# Altium PCB main.PcbDoc
Units mm, origin at the board's own origin, x right, y up, seen from the top; angles counter-clockwise.
Board outline 44.4 x 27 mm, 2 copper layers (Top Layer, Bottom Layer), stack 1.671 mm thick; 86 components, 59 nets, 304 pads, 163 vias.
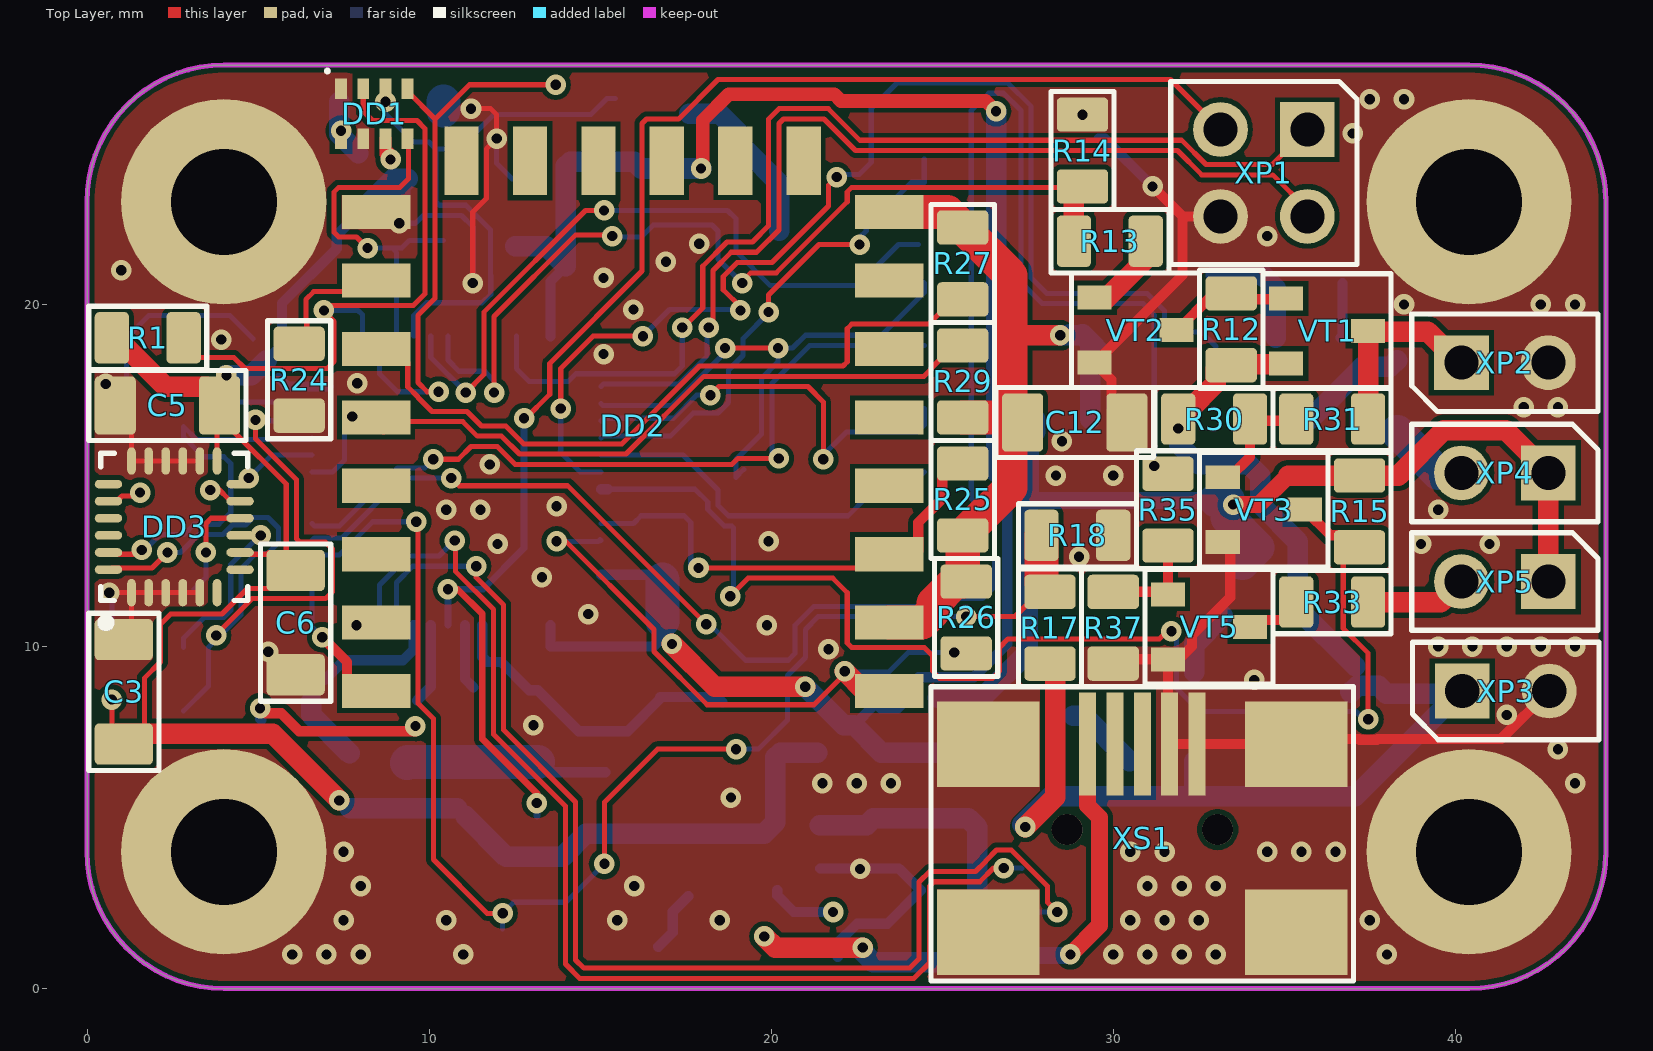
[diagram p0: Top Layer view]
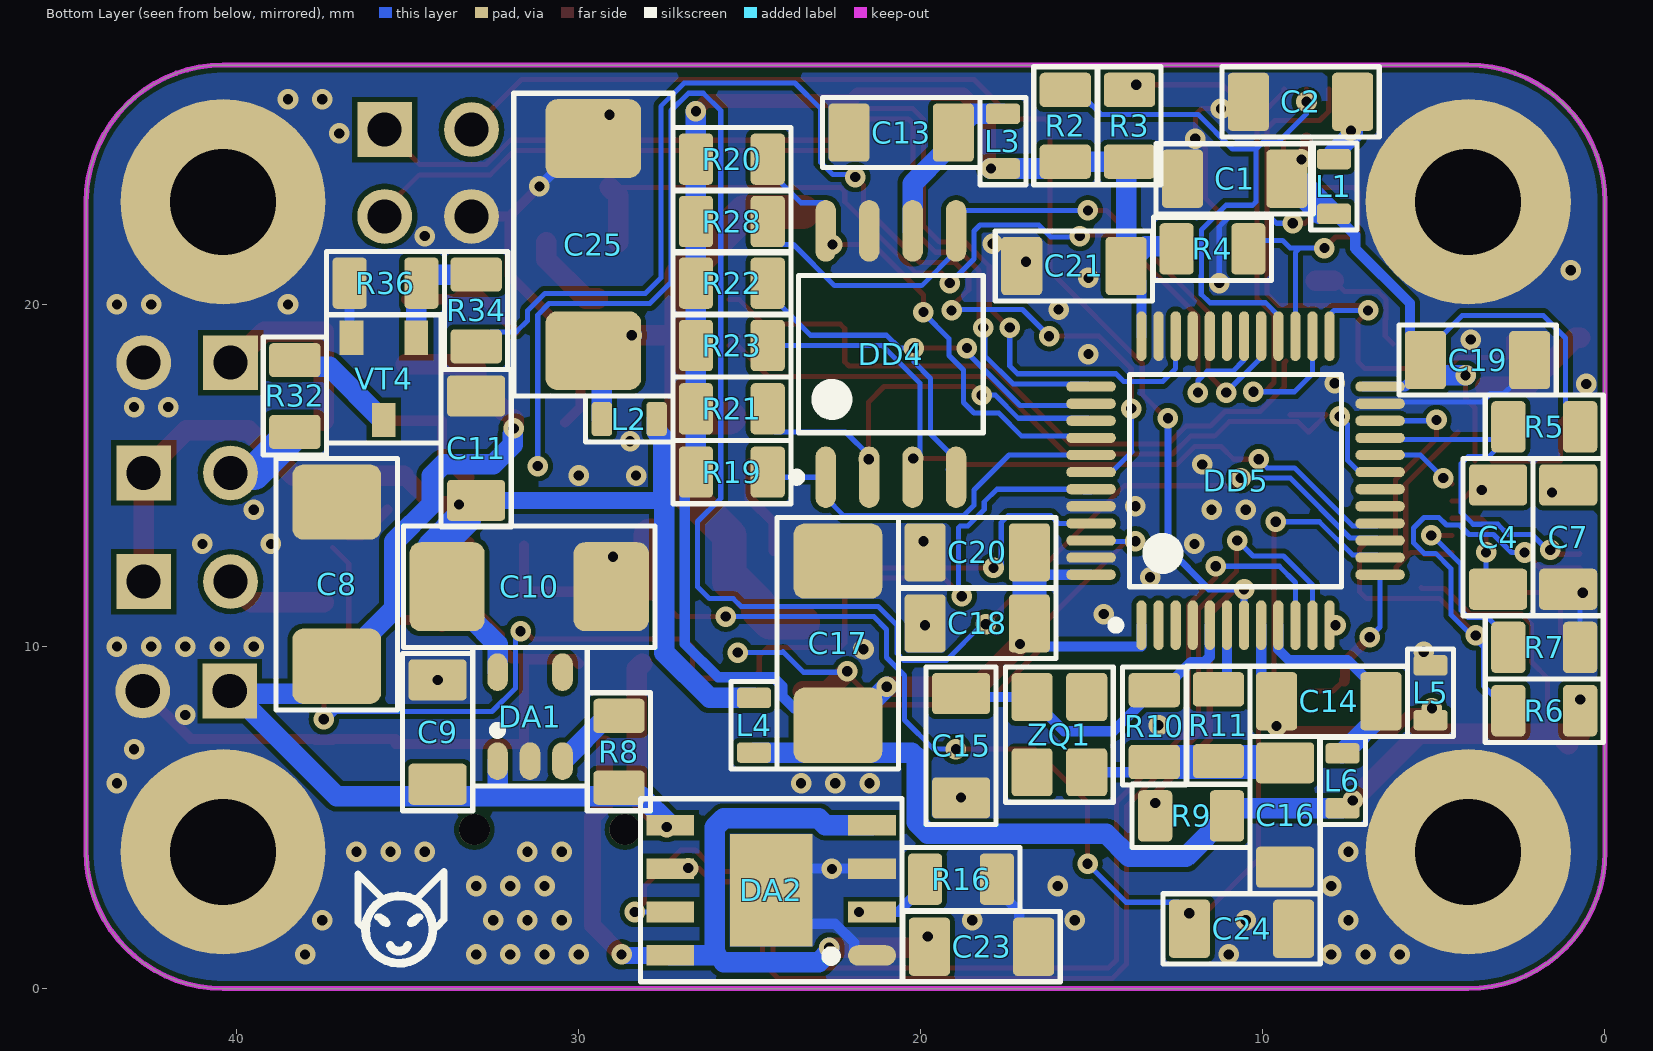
[diagram p1: Bottom Layer view, seen from below]

## Layer stack, top to bottom
Top Solder: solder mask 0.0102, Solder Resist, Dk 3.5
Top Layer: signal copper 0.0356
Dielectric 1: dielectric 1.6, FR-4, Dk 4.8
Bottom Layer: signal copper 0.0356
Bottom Solder: solder mask 0.0102, Solder Resist, Dk 3.5

## Board outline
0,4 0,23 cw(c4,23) 4,27 40.4,27 cw(c40.4,23) 44.4,23 44.4,4 cw(c40.4,4) 40.4,0 4,0 cw(c4,4)

## Design rules (kind name [scope] priority, off if disabled: settings)
Clearance [All] p1: gap=0.15 ignorepadtopadclearanceinfootprint=FALSE except(0: Arc-Hole Track-Hole SMDPad-Hole THPad-Hole Via-Hole Fill-Hole Poly-Hole Region-Hole Text-Hole)
ComponentClearance [All] p1: gap=0.15 collisioncheckmode=3 verticalgap=0.15 showdistances=FALSE
HoleSize [All] p1: absolutevalues=TRUE maxlimit=3.5 minlimit=0.025 maxpercent=80.000 minpercent=20.000
PlaneConnect [All] p1: planeconnectstyle=Relief reliefexpansion=0.5 reliefentries=4 reliefconductorwidth=0.15 reliefairgap=0.15
PolygonConnect [All] p1: connectstyle=Direct reliefconductorwidth=0.5 reliefentries=4 polygonreliefangle="45 Angle" airgapwidth=0.5
RoutingVias [All] p1: holewidth=0.3 width=0.6 viastyle="Through Hole" minholewidth=0.3 minwidth=0.6 maxholewidth=0.3 maxwidth=0.6
SilkToSilkClearance [All] p1: silktosilkclearance=0
SilkToSolderMaskClearance [IsPad] p1: minsilkscreentomaskgap=0 clearancetoexposedcopper=TRUE
SolderMaskExpansion [All] p1: expansion=0.102
Width [All] p1: maxlimit=2 minlimit=0.15 preferedwidth=0.15
25 further rules are at their usual default settings.

## Classes and differential pairs
component class CONNECT: C24 R17 R18 R32 R33 R34 R35 R36 R37 VT4 VT5 XP1 XP3 XP4 XP5 XS1
component class FLASH: C13 DD4 L3 R19 R20 R21 R22 R23 R28
component class STM32: C14 C15 C16 C17 C18 C19 C20 C21 DD5 L4 L5 L6 R9 R10 R11 ZQ1
component class MPU6050: C3 C4 C5 C6 C7 C? DD3 R5 R6 R7
component class BMP280: C1 C2 DD1 L1 R1 R2 R3 R4
component class ESP12E: DD2 R24 R25 R26 R27 R29
component class POWER: C8 C9 C10 C11 C12 C23 C25 DA1 DA2 L2 R8 R16
component class PP: R12 R13 R14 R15 R30 R31 R? VT1 VT2 VT3 VT? XP2

## Components (designator, comment, footprint, x,y, rotation, side; value= is the part's Value field where it differs from the comment)
C1 "0.1 мкФ" "C 1206" 10.8,23.675 r0 bottom
C2 "0.1 мкФ" "C 1206" 8.875,25.925 r0 bottom
C3 "10 нФ" "C 1206" 1.075,8.7 r270 top
C4 "0.1 мкФ" "C 1206" 3.125,13.175 r90 bottom
C5 "0.1 мкФ" "C 1206" 2.375,17.05 r180 top
C6 "0.1 мкФ" "C 1206" 6.1,10.725 r270 top
C7 "2200 пФ" "C 1206" 1.075,13.175 r90 bottom
C8 "10 мкФ" "C TAN_C" 37.075,11.825 r90 bottom
C9 "0.1 мкФ" "C 1206" 34.125,7.475 r90 bottom
C10 "10 мкФ" "C TAN_C" 31.45,11.75 r180 bottom
C11 "0.1 мкФ" "C 1206" 33,15.775 r90 bottom
C12 "0.1 мкФ" "C 1206" 28.85,16.55 r0 top
C13 "0.1 мкФ" "C 1206" 20.55,25.025 r0 bottom
C14 "0.1 мкФ" "C 1206" 8.05,8.4 r0 bottom
C15 "6.8 пФ" "C 1206" 18.825,7.075 r90 bottom
C16 "6.8 пФ" "C 1206" 9.35,5.05 r90 bottom
C17 "10 мкФ" "C TAN_C" 22.425,10.1 r90 bottom
C18 "0.1 мкФ" "C 1206" 18.325,10.675 r0 bottom
C19 "0.1 мкФ" "C 1206" 3.75,18.375 r180 bottom
C20 "0.1 мкФ" "C 1206" 18.325,12.75 r0 bottom
C21 "0.1 мкФ" "C 1206" 15.5,21.125 r0 bottom
C23 "0.1 мкФ" "C 1206" 18.25,1.225 r180 bottom
C24 "0.1 мкФ" "C 1206" 10.65,1.75 r180 bottom
C25 "" "C TAN_D" 29.575,21.75 r90 bottom value="100 мк"
DA1 "NCP551" TSOP-5 31.425,7.95 r90 bottom
DA2 "TP4056" HSOP-8 24.375,2.875 r0 bottom
DD1 "BMP280" LGA_2.0_2.5_8PIN 8.4,25.575 r90 top
DD2 "ESP12E (ESP8266)" ESP-12E 7.95,0.2 r90 top locked
DD3 "MPU6050" QFN50P400X400X95_HS-25N 2.55,13.5 r90 top
DD4 "AT45DB641E" SOIC127P800X216-8N 20.875,18.55 r90 bottom
DD5 "STM32F103CxTx" TSQFP50P900X900X160-48N 10.8,14.85 r90 bottom locked
L1 "BLM18AG102SN1" "FB 0603" 7.925,23.45 r90 bottom
L2 "BLM18AG102SN1" "FB 0603" 28.525,16.65 r0 bottom
L3 "BLM18AG102SN1" "FB 0603" 17.6,24.775 r270 bottom
L4 "BLM18AG102SN1" "FB 0603" 24.875,7.7 r270 bottom
L5 "BLM18AG102SN1" "FB 0603" 5.1,8.65 r270 bottom
L6 "BLM18AG102SN1" "FB 0603" 7.675,6.075 r90 bottom
R1 "10 кОм" "RES 0805" 1.775,19.025 r0 top
R2 "10 кОм" "RES 0805" 15.775,25.225 r90 bottom
R3 "10 кОм" "RES 0805" 13.9,25.225 r90 bottom
R4 "10 кОм" "RES 0805" 11.475,21.625 r180 bottom
R5 "4.7 кОм" "RES 0805" 1.775,16.425 r180 bottom
R6 "4.7 кОм" "RES 0805" 1.775,8.125 r180 bottom
R7 "4.7 кОм" "RES 0805" 1.775,9.975 r180 bottom
R8 "10 кОм" "RES 0805" 28.825,6.925 r270 bottom
R9 "10 кОм" "RES 0805" 12.1,5.05 r180 bottom
R10 "10 МОм" "RES 0805" 13.175,7.675 r90 bottom
R11 "390 Ом" "RES 0805" 11.3,7.7 r90 bottom
R12 "10 кОм" "RES 0805" 33.45,19.275 r90 top
R13 "1 кОм" "RES 0805" 29.9,21.85 r180 top
R14 "10 кОм" "RES 0805" 29.1,24.5 r90 top
R15 "2.7 кОм" "RES 0805" 37.2,13.95 r270 top
R16 "1.2 кОм" "RES 0805" 18.825,3.2 r0 bottom
R17 "10 кОм" "RES 0805" 28.15,10.55 r270 top
R18 "10 кОм" "RES 0805" 28.95,13.25 r180 top
R19 "10 кОм" "RES 0805" 25.525,15.1 r180 bottom
R20 "10 кОм" "RES 0805" 25.525,24.25 r180 bottom
R21 "10 кОм" "RES 0805" 25.525,16.95 r180 bottom
R22 "10 кОм" "RES 0805" 25.525,20.625 r180 bottom
R23 "10 кОм" "RES 0805" 25.525,18.8 r180 bottom
R24 "4.7 кОм" "RES 0805" 6.2,17.8 r270 top
R25 "4.7 кОм" "RES 0805" 25.6,14.3 r270 top
R26 "4.7 кОм" "RES 0805" 25.7,10.85 r90 top
R27 "4.7 кОм" "RES 0805" 25.6,21.2 r90 top
R28 "10 кОм" "RES 0805" 25.525,22.425 r180 bottom
R29 "4.7 кОм" "RES 0805" 25.6,17.75 r270 top
R30 "4.7кОм" "RES 0805" 32.95,16.65 r0 top
R31 "1 кОм" "RES 0805" 36.4,16.65 r0 top
R32 "270 Ом" "RES 0805" 38.3,17.325 r90 bottom
R33 "270 Ом" "RES 0805" 36.4,11.3 r180 top
R34 "1 кОм" "RES 0805" 33,19.825 r90 bottom
R35 "1 кОм" "RES 0805" 31.6,14 r270 top
R36 "10 кОм" "RES 0805" 35.65,20.625 r0 bottom
R37 "10 кОм" "RES 0805" 30,10.55 r270 top
VT1 "IRLML6402" SOT-23 36.25,19.225 r0 top
VT2 "BC817" SOT-23 30.65,19.25 r0 top
VT3 "BC817" SOT-23 34.4,14 r0 top
VT4 "BC817" SOT-23 35.7,17.825 r270 bottom
VT5 "BC817" SOT-23 32.8,10.575 r0 top
XP1 "PLD-4" PLD-4 34.405,23.845 r180 top
XP2 "PLS-2" PLS-2 41.45,18.3 r0 top
XP3 "PLS-2" PLS-2 41.475,8.7 r0 top
XP4 "PLS-2" PLS-2 41.45,15.075 r180 top
XP5 "PLS-2" PLS-2 41.45,11.9 r180 top
XS1 "USB-mini, тип B" USB_mini_B 30.85,-1.25 r180 top
ZQ1 "NX3225SA-16.000M-STD-CRS-2" NX3225SA 15.95,7.425 r90 bottom value="16 МГц"

## Footprints (in the part's own frame and the unit in brackets; to place one, negate y for a bottom-side part, rotate by r counter-clockwise, add the part's x,y. Pads: shape width x height; smd on the part's side, far side on the other; paste and mask are expansions set on the pad)
"C 1206" [mm]
  rrect20% 1.2x1.7 smd: 1(-1.5,0) 2(1.55,0)
  silkscreen extent -2.27,-1.02 2.32,1.02, body extent -1.55,-0.8 1.55,0.8, height 1.5
"C TAN_C" [mm]
  rrect30% 2.2x2.6 smd: 1(-2.4,0) 2(2.4,0)
  silkscreen extent -3.67,-1.78 3.67,1.78, body extent -3,-1.6 3,1.6, height 2.6
"C TAN_D" [mm]
  rrect30% 2.3x2.8 smd: 1(-3.1,0) 2(3.1,0)
  silkscreen extent -4.43,-2.32 4.43,2.32, body extent -3.65,-2.15 3.65,2.15, height 2.9
ESP-12E [mm] "ESP8266"
  rect 1x2 smd: 1(8.5,-15.5) 2(10.5,-15.5) 3(12.5,-15.5) 4(14.5,-15.5) 5(16.5,-15.5) 6(18.5,-15.5) 7(20.5,-15.5) 8(22.5,-15.5) 15(22.5,-0.5) 16(20.5,-0.5) 17(18.5,-0.5) 18(16.5,-0.5) 19(14.5,-0.5) 20(12.5,-0.5) 21(10.5,-0.5) 22(8.5,-0.5)
  rect 2x1 smd: 9(24,-13) 10(24,-11) 11(24,-9) 12(24,-7) 13(24,-5) 14(24,-3)
  body extent 0,-16 24,0.01, height 2.65
"FB 0603" [mm]
  rrect35% 0.6x1 smd: 1(-0.8,0) 2(0.8,0)
  silkscreen extent -1.28,-0.67 1.28,0.67, body extent -0.8,-0.43 0.8,0.43, height 0.9
HSOP-8 [mm]
  oval 1.4x0.6 smd: 1(-2.95,1.905)
  rect 1.4x0.6 smd: 2(-2.95,0.635) 3(-2.95,-0.635) 4(-2.95,-1.905) 5(2.95,-1.905) 6(2.95,-0.635) 7(2.95,0.635) 8(2.95,1.905)
  rect 2.41x3.3 smd: EP(0,0)
  silkscreen extent -3.83,-2.68 3.83,2.68, body extent -3,-2.5 3,2.5, height 1.7
LGA_2.0_2.5_8PIN [mm] "SON, 8-Leads, Body 2,50x2,00mm, Pitch 0,65mm, IPC Medium Density"
  rect 0.6x0.35 smd: 1(0.725,0.975) 2(0.725,0.325) 3(0.725,-0.325) 4(0.725,-0.975) 5(-0.725,-0.975) 6(-0.725,-0.325) 7(-0.725,0.325) 8(-0.725,0.975)
  silkscreen extent 1.2,1.33 1.3,1.42, body extent -1,-1.25 1,1.25, height 1
NX3225SA [mm]
  rrect20% 1.4x1.2 smd: 1(-1.1,-0.8) 2(1.1,-0.8) 3(1.1,0.8) 4(-1.1,0.8)
  silkscreen extent -1.97,-1.58 1.97,1.58, body extent -1.6,-1.25 1.61,1.26, height 0.55
PLD-4 [mm]
  rect 1.6x1.6 hole 1: 1(-1.27,-1.27)
  round 1.6 hole 1: 2(-1.27,1.27) 3(1.27,-1.27) 4(1.27,1.27)
  silkscreen extent -2.73,-2.68 2.73,2.68, body extent -2.54,-2.5 2.54,2.5, height 8.5
PLS-2 [mm]
  rect 1.6x1.6 hole 1: 1(-1.27,0)
  round 1.6 hole 1: 2(1.27,0)
  silkscreen extent -2.73,-1.43 2.73,1.43, body extent -2.54,-1.25 2.54,1.25, height 8.5
QFN50P400X400X95_HS-25N [mm] "QFN, 24-Leads, Body 4,00x4,00mm, Pitch 0,50mm, Thermal Pad 2,70x2,70mm, IPC Medium Density"
  oval 0.8x0.25 smd: 1(-1.925,1.25) 2(-1.925,0.75) 3(-1.925,0.25) 4(-1.925,-0.25) 5(-1.925,-0.75) 6(-1.925,-1.25) 13(1.925,-1.25) 14(1.925,-0.75) 15(1.925,-0.25) 16(1.925,0.25) 17(1.925,0.75) 18(1.925,1.25)
  oval 0.25x0.8 smd: 7(-1.25,-1.925) 8(-0.75,-1.925) 9(-0.25,-1.925) 10(0.25,-1.925) 11(0.75,-1.925) 12(1.25,-1.925) 19(1.25,1.925) 20(0.75,1.925) 21(0.25,1.925) 22(-0.25,1.925) 23(-0.75,1.925) 24(-1.25,1.925)
  silkscreen extent -2.92,-2.15 2.15,2.15, body extent -2,-2 2,2, height 0.95
"RES 0805" [mm]
  rrect25% 1x1.5 smd: 1(-1.05,0) 2(1.05,0)
  silkscreen extent -1.73,-0.92 1.73,0.92, body extent -1.05,-0.7 1.05,0.7, height 0.5
SOIC127P800X216-8N [mm] "SOIC, 8-Leads, Body 5,24x5,29mm, Pitch 1,27mm, IPC Medium Density"
  oval 1.8x0.6 smd: 1(-3.6,1.905) 2(-3.6,0.635) 3(-3.6,-0.635) 4(-3.6,-1.905) 5(3.6,-1.905) 6(3.6,-0.635) 7(3.6,0.635) 8(3.6,1.905)
  silkscreen extent -3.72,-2.7 2.3,2.88, body extent -3.99,-2.7 3.99,2.7, height 2.16
SOT-23 [mm]
  rect 1x0.7 smd paste-0.05: 1(-1.2,0.95) 2(-1.2,-0.95) 3(1.2,0)
  silkscreen extent -1.88,-1.68 1.88,1.68, body extent -1.25,-1.5 1.25,1.5, height 1
TSOP-5 [mm]
  oval 1.1x0.6 smd: 1(-1.3,0.95) 2(-1.3,0) 3(-1.3,-0.95) 4(1.3,-0.95) 5(1.3,0.95)
  silkscreen extent -2.02,-1.68 2.02,1.67, body extent -0.75,-1.5 0.75,1.5, height 1.1
TSQFP50P900X900X160-48N [mm] "TSQFP, 48-Leads, Body 7,00x7,00mm, Pitch 0,50mm, IPC Medium Density"
  oval 1.45x0.3 smd: 1(-4.225,2.75) 2(-4.225,2.25) 3(-4.225,1.75) 4(-4.225,1.25) 5(-4.225,0.75) 6(-4.225,0.25) 7(-4.225,-0.25) 8(-4.225,-0.75) 9(-4.225,-1.25) 10(-4.225,-1.75) 11(-4.225,-2.25) 12(-4.225,-2.75) 25(4.225,-2.75) 26(4.225,-2.25) 27(4.225,-1.75) 28(4.225,-1.25) 29(4.225,-0.75) 30(4.225,-0.25) 31(4.225,0.25) 32(4.225,0.75) 33(4.225,1.25) 34(4.225,1.75) 35(4.225,2.25) 36(4.225,2.75)
  oval 0.3x1.45 smd: 13(-2.75,-4.225) 14(-2.25,-4.225) 15(-1.75,-4.225) 16(-1.25,-4.225) 17(-0.75,-4.225) 18(-0.25,-4.225) 19(0.25,-4.225) 20(0.75,-4.225) 21(1.25,-4.225) 22(1.75,-4.225) 23(2.25,-4.225) 24(2.75,-4.225) 37(2.75,4.225) 38(2.25,4.225) 39(1.75,4.225) 40(1.25,4.225) 41(0.75,4.225) 42(0.25,4.225) 43(-0.25,4.225) 44(-0.75,4.225) 45(-1.25,4.225) 46(-1.75,4.225) 47(-2.25,4.225) 48(-2.75,4.225)
  silkscreen extent -4.35,-3.1 3.1,3.63, body extent -4.5,-4.5 4.5,4.5, height 1.6
USB_mini_B [mm]
  rect 3x2.5 smd paste-2: 0(-4.5,-2.9) 0(-4.5,-8.4) 0(4.5,-2.9) 0(4.5,-8.4)
  rect 0.5x3 smd: 1(1.6,-8.4) 2(0.8,-8.4) 3(0,-8.4) 4(-0.8,-8.4) 5(-1.6,-8.4)
  round 0.9 hole 0.9 unplated mask+0: H(-2.2,-5.9) H(2.2,-5.9)
  silkscreen extent -6.17,-10.07 6.18,-1.48, body extent -5.35,-9.2 5.35,0, height 3.95

## Part data
C1 C2 C3 C4 C5 C6 C7 C9 C11 C12 C13 C14 C15 C16 C18 C19 C20 C21 C23 C24: library part "CAP 1206", "SMD Capacitor 1206", Manufacturer="/Укажите компанию-производителя/", Temperature coefficient="/Формат: ±? ppm/°C/", Temperature range="/Формат: -? ... ? °C/", Tolerance="/Укажите допуск в процентах/", Size=1206, TC="/Укажите тип диэлектрика/", Type="Конденсатор керамический"
C8 C10 C17: library part "CAP TAN_C", "SMD Tantalium Capacitor C", Manufacturer="/Укажите компанию-производителя/", Temperature range="/Формат: -? ... ? °C/", Tolerance="/Укажите допуск в процентах/", ESR="/Укажите значение ЭПС/", Size=C, Type="Конденсатор танталовый"
C25: library part "CAP TAN_D", "SMD Tantalium Capacitor D", Manufacturer="/Укажите компанию-производителя/", Rated voltage="10 В", Temperature range="/Формат: -? ... ? °C/", Tolerance="/Укажите допуск в процентах/", ESR="/Укажите значение ЭПС/", Size=D, Type="Конденсатор танталовый"
R1 R2 R3 R4 R5 R6 R7 R8 R9 R10 R11 R12 R13 R14 R15 R16 R17 R18 R19 R20 R21 R22 R23 R24 R25 R26 R27 R28 R29 R30 R31 R32 R33 R34 R35 R36 R37: library part "RES 0805"
VT2 VT3 VT4 VT5: "NPN general-purpose transistor", Base-emitter on voltage="1,2 В", Collector-emitter saturation voltage="0,7 В", Manufacturer=NXP, Max collector-base voltage="50 В", Max collector-emitter voltage="45 В", Max collector current="0,5 А", Max collector peak current="1 А", Max emitter-base voltage="5 В", Power dissitipation="0,25 Вт", Temperature range="-65 ... 150 °C", Collector-base сapacitance="3 пФ", Complement=BC807, fT="100 МГц", hFE="160 ... 600", Specitication="ЭКБ ИП", Structure=n-p-n, Type="Транзистор биполярный"
XP1: "PLD connector", Manufacturer=NONAME, Connector type="Вилка на плату", Number of contacts=4, Type="Разъем штыревой"
XP2 XP3 XP4 XP5: "PLS connector", Manufacturer=NONAME, Connector type="Вилка на плату", Number of contacts=2, Type="Разъем штыревой"
XS1: library part USB-mini_B, "USB-mini-B connector", Manufacturer=NONAME, Connector type="USB-mini, тип B на плату", Number of contacts=5, Type=Разъем
ZQ1: "QUARTZ CRYSTAL", Frequency stability="±15 ppm", Load capacitance="8 пФ", Manufacturer=NDK, Temperature range="-40 ... 125 °C", Type="Кварцевый резонатор"

## Free pads (board coordinates)
  round 6 hole 3.1: GND(4,4) GND(4,23) GND(40.4,4) GND(40.4,23)

## Via types
v1: diameter 0.6, hole 0.3, Top Layer to Bottom Layer, tented both sides, 163 vias

## Nets (pads, with @x,y where several pads share a name; then routed paths per layer and width w, separated by ;. In a path a pad name is that pad's centre, name@x,y a point inside that pad or via, vN(x,y) a via of type N, cw(c..) or ccw(c..) an arc to the next point about the centre after c; other vN are vias at no path point)
3V3: C10.1 C11.1 DA1.5 L2.1 L4.1 R15.1 XP4.1 XP5.1 | length 34.8
  Top Layer w0.5: v1(33.502,14.149) 34.263,14.149 35.114,15
  Top Layer w0.6: 35.114,15 R15.1 38.337,15 39.662,16.325 41.47,16.325 XP4.1 XP5.1
  Bottom Layer w0.5: 27.525,14.237 27.563,14.275 C11.1 33.175,14.1 33.325,14.25 33.35,14.225 33.426,14.149 v1(33.502,14.149)
  Bottom Layer w0.6: L4.1 26.175,8.5 27.5,9.825 27.5,14.212 27.525,14.237 27.525,15.988 27.5,15.988 27.5,16.062 27.725,16.287 L2.1 ; DA1.5 32.375,10.062 33.2,10.887 C10.1@33.2,10.9
  Bottom Layer w1: C11.1 33.35,14.275 33.35,14.225 33.35,13.763 34.219,12.894 C10.1@33.775,12.45
ADC: C24.1 DD5.14 R17.1 R18.2 | length 40.6
  Top Layer w0.15: v1(9.625,13.65) 9.675,13.6 9.675,8.342 10.125,7.892 10.125,3.775 11.7,2.2 v1(12.15,2.2) ; v1(15.125,3.65) 15.125,5.45 16.675,7 v1(18.975,7) ; v1(25.7,10.875) 27.125,10.875 27.85,11.6 R17.1 R17.1@27.9,11.85
  Top Layer w1: R17.1@27.9,11.85 R18.2
  Bottom Layer w0.15: DD5.14 6.65,12.675 7.375,12.675 8.35,13.65 v1(9.625,13.65) ; C24.1 v1(12.15,2.2) 12.475,2.525 14,2.525 v1(15.125,3.65) ; v1(18.975,7) 19.625,7 20.475,7.85 20.475,9.153 21,9.678 21,10.501 21.374,10.875 v1(25.7,10.875)
ESP_EN: DD2.3 DD5.45 R25.1 | length 13.1
  Top Layer w0.15: v1(17.876,12.299) 23.049,12.299 DD2.3
  Top Layer w0.3: DD2.3@24.3,12.8 24.3,13.626 25,14.326 R25.1@25,15.35
  Bottom Layer w0.15: DD5.45 15.977,13.6 16.202,13.825 17.448,13.825 17.65,13.623 17.65,12.3 v1(17.876,12.299) v1@17.876,12.176
ESP_IO2: DD2.17 R27.1 | length 20
  Top Layer w0.15: DD2.17@9.325,18.35 9.375,18.3 9.375,17.593 9.675,17.293 9.675,17.283 10.083,16.875 11.109,16.875 11.534,16.45 12.241,16.45 12.766,15.925 15.633,15.925 17.908,18.2 22.1,18.2 22.225,18.325 22.225,19.293 22.357,19.425 24.6,19.425 R27.1@25.325,20.15 ; R27.1@25.3,20.15 R27.1@25.325,20.15 ; R27.1 R27.1@25.325,20.15
ESP_IO15: DD2.16 R24.1 | length 3.7
  Top Layer w0.15: R24.1 6.425,19.075 6.425,19.558 6.4,19.582 6.4,20.15 6.625,20.375 7.6,20.375 DD2.16@7.925,20.7
  Top Layer w0.6: DD2.16@7.925,20.7 DD2.16
ESP_MODE: DD2.18 DD5.19 R29.1 | length 23.4
  Top Layer w0.15: DD2.18@9.2,16.775 8.15,16.775 8.65,16.275 8.675,16.275 8.975,16.575 10.985,16.575 11.41,16.15 12.117,16.15 12.642,15.625 15.758,15.625 18.032,17.9 24.468,17.9 24.675,18.107 24.675,18.125 25.35,18.8 R29.1 R29.1@25.325,19.075
  Bottom Layer w0.15: DD5.19 7.18,15.1 7.525,15.445 7.525,16.5 v1(7.75,16.725)
ESP_RST: DD2.1 DD5.46 R26.1 | length 17.6
  Top Layer w0.15: v1(13.725,13.075) 13.9,13.075 13.95,13.125 16.575,10.5 16.575,9.858 18.133,8.3 21.25,8.3 22.151,9.201 v1(22.151,9.274)
  Top Layer w0.6: v1(22.151,9.274) 22.725,8.7 DD2.1
  Bottom Layer w0.15: v1(13.725,13.075) 14.95,13.075 15,13.125 DD5.46 ; v1(22.151,9.274) 22.176,9.249 23.426,9.249 ; 23.425,9.248 23.426,9.249 ; v1(25.35,9.825) 24.052,9.825 24.027,9.85 23.426,9.249
FLASH_RES: DD4.3 DD5.16 R23.2 | length 22
  Top Layer w0.15: v1(10.125,15.475) 10.851,15.475 11.226,15.85 11.992,15.85 12.517,15.325 18.85,15.325 19.025,15.5 v1(20.225,15.5)
  Bottom Layer w0.15: DD5.16 6.65,13.525 7.376,13.525 9.076,15.224 9.874,15.224 v1(10.125,15.475) ; DD4.3@20.025,15.5 20.025,17.7 21.125,18.8 R23.2
FLASH_WP: DD4.5 DD5.29 R28.2 | length 20.5
  Top Layer w0.15: v1(11.075,17.425) 11.6,17.95 11.6,19.775 14.575,22.75 v1(15.114,22.75)
  Bottom Layer w0.15: DD5.29 10.05,18.45 v1(11.075,17.425) ; v1(15.114,22.75) 18.725,22.75 18.97,22.505 DD4.5 18.97,21.555 19.975,20.55 22.522,20.55 23.722,21.75 R28.2@24.3,21.75
GND: C1.2 C2.2 C3.1 C5.2 C6.2 C7.1 C8.2 C9.2 C10.2 C11.2 C12.2 C13.2 C15.1 C16.1 C17.2 C18.2 C19.2 C20.2 C21.2 C23.2 C24.2 C25.2 DA1.2 DA2.1 DA2.3 DA2.EP DD1.1 DD1.7 DD2.15 DD3.1 DD3.2 DD3.3 DD3.4 DD3.5 DD3.14 DD3.15 DD3.16 DD3.17 DD3.18 DD4.7 DD5.23 DD5.35 DD5.44 DD5.47 L5.1 pad.GND R7.2 R14.2 R16.1 R18.1 R24.2 R36.2 R37.2 VT2.2 VT3.2 VT4.2 VT5.2 XP1.4 XP2.2 XP3.2 XS1.0 XS1.4 XS1.5 | length 69.8
  Top Layer w0.15: v1(0.65,11.575) DD3.1 ; C5.2 1.3,16.575 DD3.18 DD3.17 DD3.16 DD3.15 DD3.14 ; C3.1 1.3,10.425 DD3.1 ; DD3.5 DD3.4 DD3.3 DD3.2 DD3.1 ; DD2.15 8.775,22.375 v1(9.125,22.375) DD2.15@9.35,22.375 ; v1(11.225,25.725) 11.8,25.725 11.976,25.549 v1(11.976,24.85) 11.675,24.549 11.675,23.107 11.276,22.707 v1(11.276,20.625)
  Top Layer w0.3: VT2.2@29.45,18.275 VT2.2@29.463,18.287 ; VT2.2 VT2.2@29.463,18.287 ; R37.2 30.125,9.625 VT5.2 ; C12.2 29.95,17 29.95,17.8 VT2.2@29.463,18.287 ; v1(31.15,23.45) 32.025,22.575 ; XP1.4 32.025,22.575 ; VT3.2 33.42,12.83 33.42,11.445 32.302,10.327 32.302,10.003 31.949,9.65 31.625,9.65 VT5.2 ; XP3.2 41.345,7.3 37.726,7.3 37.7,7.274 37.203,7.274 37.177,7.3 35.35,7.3 35.35,7.15 XS1.5 XS1.4 31.6,7.2 VT5.2 ; VT2.2@29.463,18.287 32.025,20.85 32.025,22.575
  Bottom Layer w0.15: R7.2 C7.1@0.725,11.325 ; C19.2@2.525,17.7 2.65,17.7 2.95,17.4 3.345,17.4 3.595,17.15 6.525,17.15 DD5.23 ; v1(9.125,22.375) 9.605,22.375 9.83,22.6 10.945,22.6 11.276,22.269 v1(11.276,20.625) ; C2.2 10.625,25.725 v1(11.225,25.725) ; v1(11.976,24.85) 11.976,24.124 C1.2@12.425,23.675
  Bottom Layer w0.3: C23.2 17.125,1.65 17.125,2.25 R16.1@17.575,2.7 ; DA2.3 23.74,3.51 DA2.EP 23.4,1.9 22.509,1.9 21.95,1.341 DA2.1@21.95,0.925 ; C25.2 29.75,24.85 v1(31.15,23.45) ; VT4.2 36.7,19.075 R36.2
  Bottom Layer w1: C2.2@10.425,25.675 C2.2
  other v1: 6,1 7,1 8,1 11,1 30,1 31,1 32,1 33,1 38,1 7.5,2 10.5,2 15.5,2 18.5,2 30.5,2 31.5,2 32.5,2 37.5,2 8,3 16,3 31,3 32,3 33,3 22.6,3.5 7.5,4 30.5,4 31.5,4 34.5,4 35.5,4 36.5,4 18.825,5.586 21.5,6 22.5,6 23.5,6 43.5,6 43,7 13.05,7.7 41.5,8 34.125,9.025 5.3,9.85 21.676,9.924 39.5,10 40.5,10 41.5,10 42.5,10 43.5,10 19.875,10.622 14.65,10.95 13.3,12.025 29,12.625 12,13 39,13 41,13 19.925,13.075 10.5,14 11.5,14 39.5,14 13.725,14.1 28.325,15 30,15 11.775,15.325 28.5,16 42,17 43,17 0.55,17.675 7.9,17.7 15.1,18.55 3.925,18.975 15.975,19.85 38.5,20 42.5,20 43.5,20 15.1,20.775 1,21 16.925,21.25 17.901,21.776 34.5,22 37,25 29.1,25.55 37.5,26 38.5,26
LED_0: DD5.42 R34.1 | length 35.4
  Top Layer w0.15: v1(13.85,16.958) 13.85,18.127 14.8,19.075 v1(16.25,19.075) ; v1(19.101,19.825) 19.101,19.884 19.125,19.908 18.601,20.432 18.601,20.818 19.007,21.225 20.025,21.225 21.675,22.875 21.675,23.486 v1(21.914,23.725)
  Bottom Layer w0.15: v1(13.85,16.958) 13.85,15.718 13.826,15.694 14.42,15.1 DD5.42 ; v1(16.25,19.075) 17.025,19.85 19.076,19.85 v1(19.101,19.825) ; v1@21.925,23.714 v1(21.914,23.725) 21.989,23.8 22.573,23.8 22.925,24.152 22.925,25.725 23.675,26.475 26.917,26.475 27.6,25.792 27.6,20.774 28.049,20.325 30.99,20.325 31.5,19.815 31.5,19.525 31.825,19.2 32.575,19.2 R34.1
LED_1: DD5.15 R35.1 | length 54.1
  Top Layer w0.15: v1(10.651,14.924) 10.875,14.7 14.05,14.7 v1(18.1,10.65)
  Bottom Layer w0.15: DD5.15 6.65,13.175 7.451,13.175 9.2,14.924 v1(10.651,14.924) ; v1(18.1,10.65) 18.202,10.65 19.252,9.6 20.498,9.6 20.7,9.802 20.7,10.625 21.25,11.175 25.258,11.175 25.483,11.4 26.175,11.4 26.525,11.75 26.525,13.655 25.85,14.33 25.85,25.667 26.358,26.175 26.792,26.175 27.3,25.667 27.3,20.65 27.925,20.025 30.866,20.025 31.2,19.691 v1(31.2,15.275)
MK_A_VDD: C14.1 DD5.9 L6.2 | length 5.7
  Bottom Layer w0.3: C14.1@6.95,9.025 7.525,9.6 9.236,9.6 9.55,9.914 DD5.9
  Bottom Layer w0.6: C14.1 6.55,8 L6.2
MK_A_VSS: C14.2 DD5.8 L5.2 | length 7.7
  Top Layer w0.3: v1(5.059,8.2) 5.209,8.05 5.678,8.05 6.202,7.525 9.6,7.525 v1(9.6,7.674)
  Bottom Layer w0.3: L5.2 5.059,7.891 v1(5.059,8.2) v1@5.1,8.2 ; C14.2@9.65,8.425 10.05,8.825 DD5.8
MK_RST: DD5.7 R9.1 XP1.3 | length 43.6
  Top Layer w0.15: v1(12.776,16.676) v1(12.776,16.676) v1@12.8,16.65 ; v1@12.801,16.651 13.526,17.376 13.526,18.276 16.225,20.975 16.225,25.293 16.357,25.425 17.296,25.425 18.446,26.575 31.675,26.575 XP1.3
  Top Layer w0.2: v1(10.55,11.675) 10.833,11.675 11.555,10.953 11.555,7.295 13.15,5.7 v1(13.15,5.425)
  Bottom Layer w0.2: DD5.7 v1(10.55,11.675) 11.575,11.675 12.775,12.875 ; 12.776,12.874 v1(12.776,16.676) ; R9.1 v1(13.15,5.425)
MK_VDD: C1.1 C3.2 C5.1 C6.1 C17.1 C18.1 C19.1 C20.1 C21.1 DD1.6 DD3.8 DD3.13 DD5.1 DD5.24 DD5.36 DD5.48 L1.1 L3.2 L4.2 L6.1 R1.1 R2.1 R3.1 R4.1 R5.2 R6.2 R9.2 R19.1 R20.1 R21.1 R22.1 R23.1 R28.1 | length 124.7
  Top Layer w0.15: v1(0.725,8.45) 0.725,7.5 0.775,7.45 C3.2 ; C3.2@1.85,7.2 1.4,7.2 1.65,7.45 1.675,7.475 1.675,9.075 2.15,9.55 2.15,10.655 2.445,10.95 3.945,10.95 4.695,11.7 5.35,11.7 C6.1@5.375,11.725 ; DD3.13 3.8,16.975 C5.1 4.075,17.25 v1(4.075,17.925) ; C5.1@4.3,16.275 5.825,14.75 C6.1@5.825,12.6 ; DD3.8 4.525,12.7 5.268,12.7 5.318,12.75 5.675,12.75 C6.1@5.825,12.6 ; C6.1 6.1,12.325 C6.1@5.825,12.6
  Top Layer w0.35: DD1.6 8.725,24.389 8.8,24.464 8.875,24.389 v1(8.875,24.239)
  Top Layer w0.4: v1(17.95,23.975) 18,24.025 18,25.386 18.764,26.15 21.844,26.15 22.044,25.95 26.275,25.95 v1(26.575,25.65)
  Top Layer w0.6: C3.2@0.725,7.45 0.775,7.45 1.65,7.45 5.429,7.45 v1(7.377,5.502) ; R1.1 0.866,19.025 2.291,17.6 C5.1@3.5,17.6 ; C3.2 C3.2@1.175,7.25 ; v1(17.1,10.075) 18.35,8.825 v1(21,8.825)
  Bottom Layer w0.15: R6.2 v1(0.725,8.45) ; R5.2 1.15,16.85 1.15,19.023 1.802,19.675 4.175,19.675 C19.1@4.85,19
  Bottom Layer w0.3: C19.1 5.7,18.825 5.7,20.033 7.3,21.633 7.3,22.025 L1.1 ; C19.1@5.6,17.85 5.85,17.6 DD5.24 DD5.24@7.05,17.6 ; DD5.1 13.55,10 16.55,10 C18.1@16.825,10.275 ; DD5.36 13.55,20.675 C21.1 ; DD5.48 16.675,12.1 C20.1@16.825,11.95 ; C17.1 23.063,8.338 23.201,8.2 23.699,8.2 24.051,8.553 24.051,8.839 24.312,9.1 25.926,9.1 26.9,10.074 26.9,14.46 26.925,14.485 R19.1@26.925,14.975
  Bottom Layer w0.6: v1(4.075,17.925) 4.8,17.925 C19.1 ; L6.1 R9.2@10.825,5.275 ; R9.2 12.25,3.85 13.9,3.85 14.575,4.525 19.791,4.525 20.125,4.859 20.125,6.758 20.267,6.9 C17.1@21.35,6.9 ; R4.1@12.525,21.7 13.425,21.7 C21.1 14,24.05 14.125,24.175 R2.1 16,24.175 16.2,23.975 L3.2 v1(17.95,23.975) ; v1(21,8.825) 22.125,7.7 C17.1 23.225,6.9 L4.2 ; R19.1 R21.1 R23.1 R22.1 R28.1 R20.1 v1(26.575,25.65) ; L1.1 8.35,22.65 8.375,22.675 8.375,22.685 8.815,23.125 9.025,23.125 9.15,23.25 9.15,23.45 9.375,23.675 C1.1 8.95,23.675 L1.1
  Bottom Layer w1: C18.1@16.825,10.75 C20.1@16.825,11.95
MPU_AD0: DD3.9 R7.1 | length 5.2
  Top Layer w0.15: DD3.9 v1@5.076,13.25
  Bottom Layer w0.15: R7.1 2.825,10.25 3.425,10.85 3.998,10.85 4.2,11.052 4.2,12.399 v1@5.063,13.262
  other v1: 5.075,13.249
MPU_CPOUT: C7.2 DD3.20 | length 1
  Top Layer w0.15: DD3.20 0.875,14.25 1.025,14.4 v1@1.55,14.4
  other v1: 1.55,14.5
MPU_FSYNC: C4.2 DD3.11 | length 1.2
  Top Layer w0.15: v1@3.525,14.65 v1(3.6,14.574) 3.724,14.574 3.8,14.65 4.2,14.25 DD3.11
MPU_INT: DD3.12 DD5.20 | length 2.6
  Top Layer w0.15: DD3.12 4.713,14.987 4.655,14.929 4.66,14.924 v1(4.725,14.924)
  Bottom Layer w0.15: v1(4.725,14.924) 5.401,15.6 DD5.20
MPU_REGOUT: C4.1 DD3.10 | length 3.1
  Top Layer w0.15: v1(3.475,12.75) 3.475,13.6 3.625,13.75 DD3.10
  Bottom Layer w0.15: C4.1 3.475,12.025 v1(3.475,12.75)
MPU_SCL: DD3.23 DD5.21 R5.1 | length 11.4
  Top Layer w0.15: DD3.23@0.725,12.725 0.75,12.7 1.5,12.7 1.624,12.824 v1(1.6,12.824)
  Bottom Layer w0.15: v1(1.6,12.824) 1.683,12.824 2.133,13.274 2.833,13.274 3.133,13.575 3.85,13.575 4.2,13.925 4.2,15.348 3.998,15.55 3.4,15.55 2.825,16.125 R5.1 3.2,16.05 6.525,16.05 DD5.21
MPU_SDA: DD3.24 DD5.22 R6.1 | length 24.4
  Top Layer w0.15: DD3.24@0.726,12.299 1.9,12.299 v1(2.35,12.749) ; v1(3.775,10.324) 3.775,10.356 4.819,11.4 6.973,11.4 7.175,11.602 7.175,12.848 6.973,13.05 6.225,13.05 6.125,13.15 6.125,14.874 4.925,16.074 v1(4.925,16.625)
  Bottom Layer w0.15: v1(2.35,12.749) 2.732,12.749 3.258,13.275 3.976,13.275 4.25,13.549 4.633,13.549 4.858,13.774 5.293,13.774 5.6,13.467 5.6,13.032 5.293,12.724 4.949,12.724 4.5,12.275 4.5,10.928 v1@3.861,10.289 ; R6.1 3.55,8.85 3.55,9.978 v1@3.861,10.289 ; v1(3.775,10.324) 3.826,10.324 v1@3.861,10.289 ; v1(4.925,16.625) 4.95,16.6 DD5.22
NetC2_1: C2.1 DD1.8 L1.2 | length 1.7
  Bottom Layer w0.6: C2.1 7.375,24.975 L1.2@7.925,24.425
  other v1: 7.425,25.075
NetC13_1: C13.1 DD4.6 L3.1 | length 4.4
  Bottom Layer w0.6: L3.1 18.5,25.575 C13.1 ; C13.1@19.3,24.475 20.24,23.535 DD4.6
NetC16_2: C16.2 R10.1 R11.1 ZQ1.1 | length 5.9
  Bottom Layer w0.3: R10.1 13.475,6.325 ZQ1.1
  Bottom Layer w1: C16.2 9.375,6.625 R10.1
NetDA1_3: DA1.3 R8.1 | length 2.2
  Bottom Layer w0.6: R8.1 29.15,7.975 DA1.3
NetDA2_2: DA2.2 R16.2 | length 2
  Bottom Layer w0.3: R16.2@20.175,2.875 20.175,2.725 20.66,2.24 DA2.2 v1(21.81,2.24)
NetR12_2: R12.2 VT1.1 VT2.3 | length 3.7
  Top Layer w0.3: VT2.3@31.85,19.225 32.925,20.3 33.45,20.3 33.6,20.15 VT1.1@35.05,20.15
NetR13_1: R13.1 VT2.1 | length 2.5
  Top Layer w0.6: VT2.1@29.45,20.175 29.8,20.175 30.95,21.325 R13.1@30.95,21.825
NetR30_2: R30.2 R31.1 VT3.1 | length 3.4
  Top Layer w0.3: VT3.1 33.4,14.95 34,15.55 34,16.6 R31.1@35.35,16.6
NetR32_1: R32.1 XP4.2 | length 2.4
  Bottom Layer w1: R32.1 39.5,15.075 XP4.2
NetR32_2: R32.2 VT4.3 | length 3.3
  Bottom Layer w0.6: VT4.3 35.736,16.625 37.286,18.175 38.1,18.175 R32.2
NetR33_1: R33.1 XP5.2 | length 3
  Top Layer w0.6: R33.1 39.58,11.3 XP5.2
NetR33_2: R33.2 VT5.3 | length 1.9
  Top Layer w0.3: VT5.3 34.2,10.775 35.225,10.775 35.35,10.9 R33.2
NetR34_2: R34.2 R36.1 VT4.1 | length 3.4
  Bottom Layer w0.6: R34.2 34.35,20.875 R36.1 34.75,20.475 VT4.1
NetR35_2: R35.2 R37.1 VT5.1 | length 3.1
  Top Layer w0.3: R37.1 31.525,11.6 VT5.1 R35.2
OSC_IN: C15.2 DD5.5 R10.2 ZQ1.3 | length 9.4
  Bottom Layer w0.3: DD5.5 11.55,9.7 11.7,9.55 12.101,9.55 12.926,8.725 R10.2 14.375,7.525 15.804,7.525 16.75,8.471 ZQ1.3 18.425,8.525 C15.2@18.575,8.375
OSC_OUT: DD5.6 R11.2 | length 1.9
  Bottom Layer w0.3: DD5.6 11.05,9.05 R11.2@11.3,8.8
PP_IN: DD5.43 R15.2 VT3.3 | length 38
  Top Layer w0.15: v1(18.801,11.474) 19.326,11.999 21.801,11.999 22.225,11.575 22.225,10.107 22.357,9.975 24.475,9.975 24.725,9.725 24.725,9.28 24.93,9.075 26.47,9.075 26.675,9.28 26.675,9.975 26.925,10.225 29.23,10.225 30.77,10.225 31.35,10.225 31.574,10.449 v1(31.702,10.449) ; R15.2 36.725,12.425 36.725,10.53 37.452,9.803 v1(37.452,7.874)
  Top Layer w0.3: VT3.3 36.35,13.25 R15.2@36.725,13.25
  Bottom Layer w0.15: DD5.43@15.225,14.6 17.775,14.6 18.145,14.23 18.145,14.008 18.628,13.525 18.85,13.525 18.9,13.475 18.9,11.5 18.874,11.474 v1(18.801,11.474) ; v1@31.7,10.275 v1@31.702,10.277 ; v1(31.702,10.449) v1@31.702,10.277 ; v1@37.524,7.874 v1(37.452,7.874) 37.325,7.874 37.099,8.1 32.533,8.1 31.85,8.783 31.85,10.425 v1@31.702,10.277
  Bottom Layer w0.3: DD5.43 DD5.43@15.225,14.6
PP_ON: DD5.30 R13.2 R14.1 | length 27.5
  Top Layer w0.15: v1(11.9,17.425) 11.9,19.651 14.275,22.026 15.201,22.026 v1@15.251,21.976 ; v1(19.151,20.626) 19.151,20.675 19.401,20.925 20.15,20.925 22.225,23 22.225,23.293 22.357,23.425 29.075,23.425 R14.1
  Top Layer w0.6: R13.2@28.85,21.825 R13.2 28.85,23.175 R14.1@29.1,23.425
  Bottom Layer w0.15: DD5.30 10.55,18.374 10.875,18.05 11.625,18.05 11.9,17.775 v1(11.9,17.425) ; v1@15.251,21.976 16.203,21.976 16.552,22.325 18.27,22.325 18.445,22.15 18.445,21.333 v1(19.151,20.626)
  other v1: 15.351,22.001
PP_OUT: R31.2 VT1.3 XP2.1 | length 5.8
  Top Layer w0.6: R31.2@37.45,16.6 37.45,19.2 39.2,19.2 XP2.1@40.2,18.2
SPI1_CLK: DD4.2 DD5.39 R21.2 | length 12.7
  Top Layer w0.15: v1(18.225,17.35) 18.475,17.6 21.075,17.6 21.525,17.15 v1(21.525,15.475)
  Bottom Layer w0.15: DD5.39 15.1,16.675 17.149,16.675 17.824,17.35 v1(18.225,17.35) ; DD4.2@21.51,15.475 21.51,15.585 22.2,16.275 24.275,16.275 24.475,16.475 R21.2
SPI1_CS: DD4.4 DD5.38 R22.2 | length 16.1
  Top Layer w0.15: v1(18.651,18.725) v1(20.2,18.725)
  Bottom Layer w0.15: DD5.38 15.075,17.05 17.1,17.05 18.738,18.688 18.651,18.774 v1(18.651,18.725) ; DD4.4@19.2,15.18 DD4.4 18.97,15.47 19.715,16.215 19.715,17.84 20.2,18.325 v1(20.2,18.725) 20.626,18.725 21.001,19.1 23.225,19.1 24.475,20.35 R22.2 R22.2@24.375,20.725
SPI1_MISO: DD4.8 DD5.40 R20.2 | length 15.2
  Top Layer w0.15: v1(19.925,19.777) 19.925,20.275 21.4,21.75 v1(22.585,21.75)
  Bottom Layer w0.15: DD5.40 15.075,16.15 17.049,16.15 17.724,16.825 18.442,16.825 18.75,17.133 18.75,18.081 19.176,18.507 19.176,19.001 19.925,19.75 v1(19.925,19.777) v1@20.075,19.927 ; v1(22.585,21.75) 22.585,21.955 DD4.8 22.78,22.975 23.5,22.975 24.1,23.575 24.475,23.575 R20.2
SPI1_MOSI: DD4.1 DD5.41 R19.2 | length 11.3
  Bottom Layer w0.15: DD5.41 17.425,15.6 18.445,14.58 18.445,14.133 18.753,13.825 19.187,13.825 21.925,13.825 22.25,13.825 22.78,14.355 DD4.1 24.325,14.95 R19.2
SPI2_CLK: DD1.4 DD5.26 R3.2 | length 16.8
  Top Layer w0.15: DD1.4 9.375,26.225 10.175,25.425 10.175,25.417 ; v1(10.276,17.45) 9.943,17.45 9.675,17.717 9.675,19.683 10.175,20.183 10.175,25.417 ; v1(13.7,26.425) 11.183,26.425 10.175,25.417
  Bottom Layer w0.15: DD5.26 8.55,17.975 9.075,17.45 v1(10.276,17.45)
SPI2_CS: DD1.2 DD5.25 R1.2 | length 19.2
  Top Layer w0.15: R1.2 2.825,18.5 2.875,18.45 4.292,18.45 4.617,18.125 7.02,18.125 7.225,18.33 7.225,19.5 6.925,19.8 v1(6.925,19.825) 7.076,19.975 9.543,19.975 9.875,20.307 9.875,25.143 9.643,25.375 8.343,25.375 8.075,25.643 DD1.2
  Bottom Layer w0.15: v1(6.925,19.825) 7.925,19.825 8.05,19.7 DD5.25
SPI2_MISO: DD1.5 DD5.27 R4.2 | length 10.8
  Top Layer w0.15: v1(8.2,21.65) 7.875,21.975 7.357,21.975 7.225,22.107 7.225,23.293 7.357,23.425 9.15,23.425 9.4,23.675 DD1.5@9.4,24.85
  Bottom Layer w0.15: v1(8.2,21.65) 8.924,21.65 ; DD5.27 9.05,21.524 8.924,21.65 ; R4.2@10.425,21.875 9.426,21.875 9.2,21.65 8.924,21.65
SPI2_MOSI: DD1.3 DD5.28 R2.2 | length 17
  Top Layer w0.15: v1@8.725,25.875 v1(8.725,25.925) DD1.3
  Bottom Layer w0.15: v1(8.725,25.925) 8.725,25.575 9.55,24.75 9.998,24.75 10.2,24.548 ; DD5.28 9.55,19.68 9.92,20.05 11.55,20.05 11.801,20.301 11.801,20.842 ; 11.8,20.843 11.8,22.175 11.075,22.9 10.3,22.9 10.2,23 10.2,24.548 ; R2.2@15.45,26.025 15.2,26.025 14.725,25.55 11.892,25.55 10.89,24.548 10.2,24.548
SW_CLK: DD5.37 XP1.2 | length 28.4
  Top Layer w0.15: v1(18.175,19.325) 18.301,19.451 18.301,20.991 18.835,21.525 19.575,21.525 20.225,22.175 20.225,25.293 20.357,25.425 21.543,25.425 22.468,24.5 31.876,24.5 32.586,23.79 34.66,23.79 35.675,22.775 XP1.2
  Bottom Layer w0.15: DD5.37 15.1,17.675 17.301,17.675 18.129,18.504 18.126,18.507 18.126,19.276 v1(18.175,19.325)
SW_DIO: DD5.34 XP1.1 | length 31.9
  Top Layer w0.15: v1(17.401,19.325) 17.432,19.325 18.001,19.893 18.001,21.116 18.71,21.825 19.451,21.825 19.925,22.299 19.925,25.417 20.233,25.725 21.667,25.725 22.592,24.8 32,24.8 32.71,24.09 34.65,24.09 XP1.1
  Bottom Layer w0.15: DD5.34 12.55,18.125 12.925,17.75 14.07,17.75 14.295,17.975 17.175,17.975 17.401,18.201 v1(17.401,19.325) v1@17.5,19.325
TP_BAT: C8.1 C9.1 DA1.1 DA2.5 R8.2 R12.1 R17.2 R30.1 VT1.2 XP3.1 | length 37.6
  Top Layer w0.6: v1(27.425,4.725) 28.3,5.6 28.3,9.35 R17.2 ; v1(31.9,16.375) R30.1 ; R30.1@32.2,16.9 33,17.7 33,18.125 33.075,18.2 33.45,18.2 33.5,18.25 VT1.2@35.05,18.25
  Bottom Layer w0.6: DA2.5@27.347,4.802 28.17,5.625 32.325,5.625 ; v1@31.925,16.2 31.925,15.9 32.5,15.325 33.966,15.325 34.3,14.991 34.3,14.157 35.4,13.057 35.4,11.1 C8.1 ; DA1.1 32.375,5.675 32.325,5.625 ; C8.1@36.925,8.675 36.945,8.655 37.139,8.85 37.761,8.85 37.986,8.625 40.075,8.625 37.075,5.625 32.325,5.625
TP_CH: DA2.7 DD5.10 | length 35.5
  Top Layer w0.15: v1(11.376,12.349) 11.376,12.016 12.18,11.212 12.18,7.562 14.284,5.458 14.284,0.841 14.524,0.6 24.051,0.6 24.325,0.874 24.325,3.117 24.633,3.425 25.975,3.425 26.276,3.726 26.276,3.741 26.585,4.05 27.018,4.05 28.075,2.993 28.075,2.525 v1(28.36,2.24)
  Bottom Layer w0.15: DD5.10 9.05,11.876 9.524,12.349 v1(11.376,12.349) ; DA2.7 v1(28.36,2.24)
TP_ST: DA2.6 DD5.11 | length 33.8
  Top Layer w0.15: v1@10.767,13.082 10.767,12.2 11.88,11.088 11.88,7.438 13.984,5.334 13.984,0.716 14.4,0.3 24.175,0.3 24.625,0.75 24.625,2.993 24.757,3.125 26.099,3.125 26.498,3.524 v1(26.801,3.524)
  Bottom Layer w0.15: DD5.11 8.55,11.8 9.399,12.649 10.292,12.649 10.742,13.099 v1(10.751,13.099) v1@10.751,13.05 ; v1(26.801,3.524) 27.309,3.524 27.31,3.525 DA2.6
UART_RX: DD2.22 DD5.13 | length 4.5
  Top Layer w0.15: DD2.22@7.6,9.05 7.625,9.025 7.95,8.7 DD2.22
  Top Layer w0.3: v1(6.875,10.275) 7.6,9.55 DD2.22@7.6,9.05 ; DD2.22@7.625,8.975 DD2.22@7.625,9.025
  Bottom Layer w0.15: DD5.13 6.575,10.575 v1(6.875,10.275)
UART_TX: DD2.21 DD5.12 | length 0.2
  Bottom Layer w0.15: v1(7.875,10.625) DD5.12
USB_VDD: C23.1 DA2.4 DA2.8 XS1.1 | length 24.5
  Top Layer w0.5: v1(28.75,1) 29.6,1.85 29.6,5 29.25,5.35 XS1.1
  Top Layer w0.6: v1(19.8,1.525) 20.125,1.2 v1(22.675,1.2)
  Bottom Layer w0.3: 25.766,0.775 25.88,0.889
  Bottom Layer w0.5: DA2.8 28.72,0.97 v1(28.75,1)
  Bottom Layer w0.6: DA2.4 22.789,4.78 22.984,4.975 25.766,4.975 26.03,4.711 26.03,1.039 25.961,0.97 DA2.8 ; v1(22.675,1.2) 22.675,1.084 22.984,0.775 25.766,0.775
VDD_WIFI: C12.1 C25.1 DD2.2 DD2.8 L2.2 R25.2 R26.2 R27.2 R29.2 | length 23.1
  Top Layer w0.6: 27,19.075 27.05,19.125 27.074,19.1 v1(28.45,19.1)
  Top Layer w1: DD2.2 24.4,10.7 24.75,11.05 24.75,11.269 25.382,11.9 25.6,11.9 R25.2 27,14.65 27,16.65 C12.1@26.95,16.7 ; DD2.8 25.15,22.7 R27.2 27,20.85 27,19.075 27,16.75 C12.1@26.95,16.7 ; R29.2 C12.1@26.95,16.7
  Bottom Layer w0.6: v1(28.45,19.1) C25.1@28.7,19.1 ; C25.1@28.725,19.125 C25.1@28.7,19.1 ; L2.2 29.325,18.7 C25.1@29.425,18.8 ; C25.1 C25.1@29.425,18.8 ; C25.1@28.7,19.1 29.078,19.1 29.101,19.124 C25.1@29.425,18.8
pads on no net: DA1.4 DD2.4 DD2.5 DD2.6 DD2.7 DD2.9 DD2.10 DD2.11 DD2.12 DD2.13 DD2.14 DD2.19 DD2.20 DD3.6 DD3.7 DD3.19 DD3.21 DD3.22 DD5.2 DD5.3 DD5.4 DD5.17 DD5.18 DD5.31 DD5.32 DD5.33 XS1.2 XS1.3 XS1.H ZQ1.2 ZQ1.4

## Polygon pours and split planes (outlines as drawn)
GND on Top Layer "Bottom Layer-No Net" (solid, remove dead copper, pour order 2): 0,27 0,0 44.4,0 44.4,27
GND on Bottom Layer "Bottom Layer-No Net" (solid, remove dead copper, pour order 0): 0,27 0,0 44.4,0 44.4,27

## Keep-outs
Keep-Out Layer:
  the board outline again, w0.15

## Silkscreen, mask and mechanical layers (free items; w line width, h text height)
Bottom Overlay:
  circle w0.254: c35.25,1.725 r0.985
  lines w0.2: 34.15,1.8 33.935,2.015 33.935,3.425 34.71,2.65 ; 34.642,2.097 cw(c34.642,1.795) 34.925,1.9 cw(c34.925,2.108) 34.718,2.1 ; 35.675,2.575 36.45,3.35 36.45,1.94 36.235,1.725 ; 35.807,2.1 cw(c35.6,2.108) 35.6,1.9 cw(c35.883,1.795) 35.883,2.097
  lines w0.254: 34.997,1.263 ccw(c35.253,1.375) 35.508,1.26